# Altium PCB UsbConBoard.PcbDoc
Units mil, origin at the board's own origin, x right, y up, seen from the top; angles counter-clockwise.
Board outline 2755.91 x 787.4 mil, 2 copper layers (Top Layer, Bottom Layer), stack 61.756 mil thick; 29 components, 14 nets, 77 pads, 8 vias.
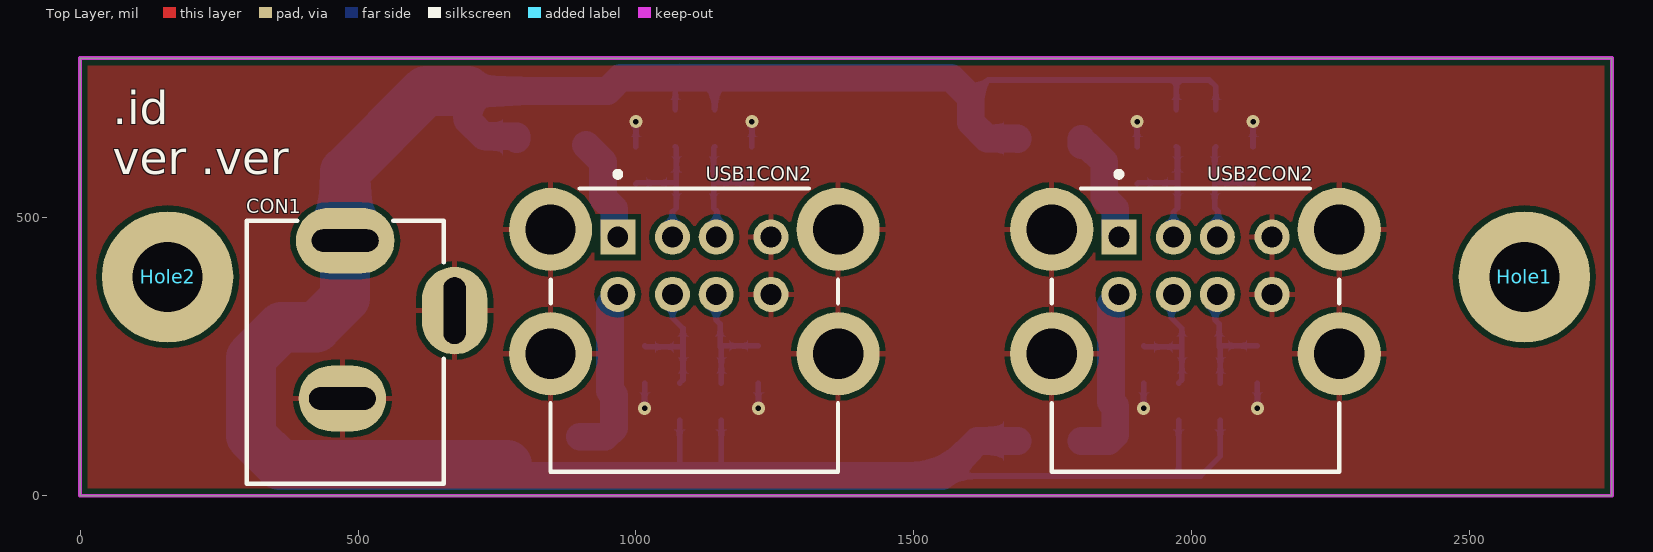
[diagram p0: Top Layer view]
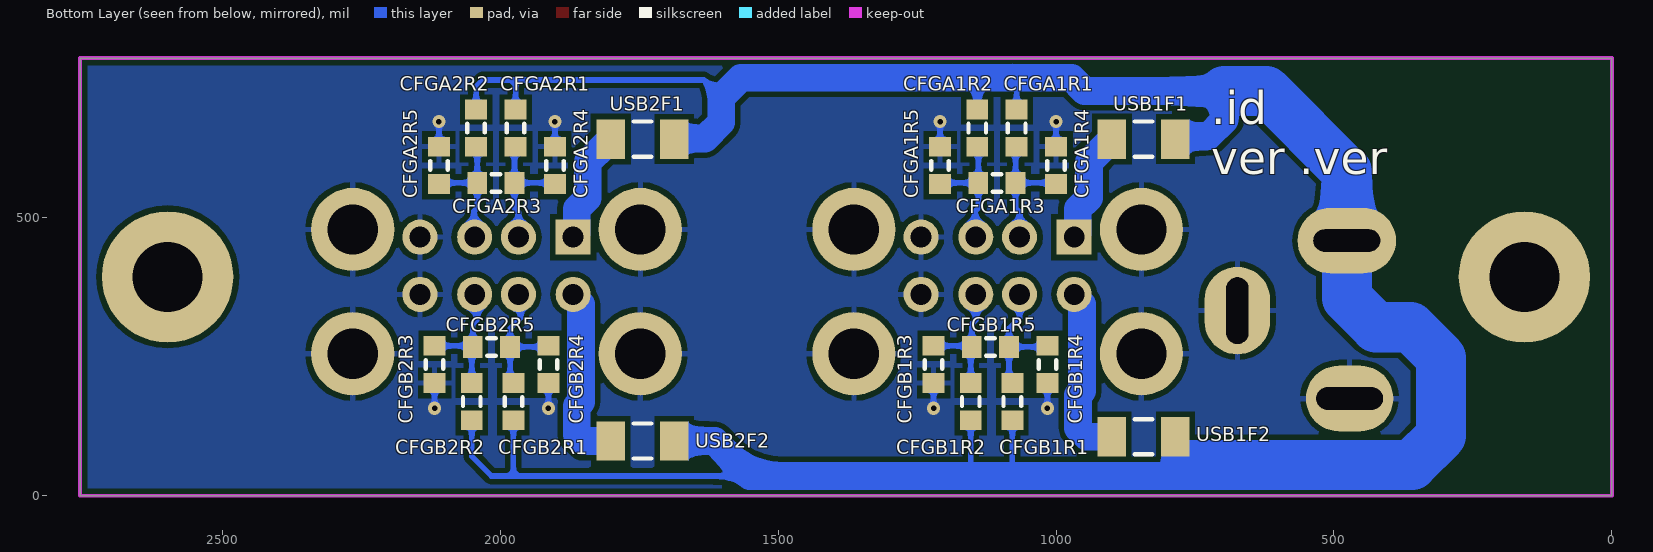
[diagram p1: Bottom Layer view, seen from below]

## Layer stack, top to bottom
Top Solder: solder mask 1, SM-001, Dk 4
Top Layer: signal copper 1.3779
Dielectric 1: core 59, Core-043, Dk 4.3
Bottom Layer: signal copper 1.3779
Bottom Solder: solder mask 1, SM-001, Dk 4

## Board outline
0,0 2755.91,0 2755.91,787.4 0,787.4

## Design rules (kind name [scope] priority, off if disabled: settings)
Clearance "Stitching GNDA" [IsStitchingVia and InNet('GNDA') vs (IsVia and (Not IsStitchingVia)) Or IsPad] p1: gap=5 ignorepadtopadclearanceinfootprint=FALSE except(0: Arc-Hole Track-Hole SMDPad-Hole THPad-Hole Via-Hole Fill-Hole Poly-Hole Region-Hole Text-Hole)
Clearance ShieldClearance_BOT [InNamedPolygon('GND_BOT') vs InNet('SHIELD')] p2: gap=30 ignorepadtopadclearanceinfootprint=FALSE except(0: Arc-Hole Track-Hole SMDPad-Hole THPad-Hole Via-Hole Fill-Hole Poly-Hole Region-Hole Text-Hole)
Clearance ANTClearance_TOP [InNamedPolygon('GND_TOP') vs InNetClass('50R')] p3: gap=13.78 ignorepadtopadclearanceinfootprint=FALSE
Clearance [All] p4: gap=7 ignorepadtopadclearanceinfootprint=TRUE except(10: Arc-Fill Arc-Poly Arc-Region Track-Fill Track-Poly Track-Region SMDPad-Fill SMDPad-Poly SMDPad-Region THPad-Fill THPad-Poly THPad-Region Via-Fill Via-Poly Via-Region Fill-Fill Fill-Poly Fill-Region Poly-Poly Poly-Region Region-Region)
DiffPairsRouting DIFF_USB [InDifferentialPair('USB')] p1: maxlimit=17.72 minlimit=7 mostfreqgap=7 toplayer_minwidth=10 toplayer_maxwidth=15.75 toplayer_prefwidth=12.99 bottomlayer_minwidth=10 bottomlayer_maxwidth=15.75 bottomlayer_prefwidth=12.99 maxuncoupledlength=500
Height [All] p1: minheight=0 maxheight=1200 prefheight=500
HoleSize [All] p1: absolutevalues=TRUE maxlimit=200 minlimit=1 maxpercent=80.000 minpercent=20.000
MatchedLengths DiffPair_100_2MatchedLengths [InNetClass('DIFF100_A')] p1: tolerance=1000 checknetsindiffpair=TRUE checkdiffpairvsdiffpair=FALSE checkxsignals=FALSE checkothers=FALSE
MatchedLengths DiffPair_100MatchedLengths [InNetClass('DIFF100_B')] p2: tolerance=5 checknetsindiffpair=TRUE checkdiffpairvsdiffpair=FALSE checkxsignals=FALSE checkothers=FALSE
MinimumSolderMaskSliver [All] p1: minsoldermaskwidth=1
PasteMaskExpansion [InNet('230V_N')] p1: expansion=20
PlaneClearance [All] p1: clearance=10
PlaneConnect Via_Thermal_Relief [IsStitchingVia Or IsVia] p1: planeconnectstyle=Direct reliefexpansion=20 reliefentries=4 reliefconductorwidth=10 reliefairgap=40
PlaneConnect ShieldConnect [InNet('SHIELD')] p2: planeconnectstyle=Relief reliefexpansion=20 reliefentries=4 reliefconductorwidth=10 reliefairgap=40
PlaneConnect [All] p3: planeconnectstyle=Relief reliefexpansion=8 reliefentries=4 reliefconductorwidth=8 reliefairgap=5
PolygonConnect GNDA_VIA_CONN [InNet('GND') And (IsStitchingVia Or IsVia)] p1: connectstyle=Direct reliefconductorwidth=10 reliefentries=4 polygonreliefangle="90 Angle" airgapwidth=10
PolygonConnect [All] p2: connectstyle=Relief reliefconductorwidth=10 reliefentries=4 polygonreliefangle="90 Angle" airgapwidth=10
RoomDefinition CFGB2 [InComponentClass('CFGB2')] p1: confinementstyle=ConfineIn formatcopy=TRUE lockcomponents=FALSE outline 1744.09,0 2263.78,0 2263.78,413.39 1744.09,413.39
RoomDefinition CFGB1 [InComponentClass('CFGB1')] p2: confinementstyle=ConfineIn formatcopy=TRUE lockcomponents=FALSE outline 846.46,0 1366.14,0 1366.14,413.39 846.46,413.39
RoomDefinition CFGA2 [InComponentClass('CFGA2')] p3: confinementstyle=ConfineIn formatcopy=TRUE lockcomponents=FALSE outline 1744.09,413.39 2263.78,413.39 2263.78,787.4 1744.09,787.4
RoomDefinition CFGA1 [InComponentClass('CFGA1')] p4: confinementstyle=ConfineIn formatcopy=TRUE lockcomponents=FALSE outline 842.52,413.39 1362.2,413.39 1362.2,787.4 842.52,787.4
RoutingVias [All] p1: holewidth=5.91 width=11.81 viastyle="Through Hole" minholewidth=5.91 minwidth=11.81 maxholewidth=500 maxwidth=1000
SilkToSilkClearance [All] p1: silktosilkclearance=5
SilkToSolderMaskClearance SilkscreenOverComponentPads [IsPad] p1: minsilkscreentomaskgap=1 clearancetoexposedcopper=TRUE
SolderMaskExpansion [InNet('230V_N')] p1: expansion=5
Width ANT [InNetClass('50R')] p1: maxlimit=23.43 minlimit=23.43 preferedwidth=23.43
Width GND [InNet('GND')] p2: maxlimit=100 minlimit=8 preferedwidth=50
Width 3V3 [InNet('3V3')] p3: maxlimit=40 minlimit=8 preferedwidth=30
Width 5V [InNet('5V')] p4: maxlimit=90 minlimit=10 preferedwidth=60
Width 24V [InNet('24V')] p5: maxlimit=80 minlimit=10 preferedwidth=60
Width [All] p6: maxlimit=100 minlimit=6 preferedwidth=8
21 further rules are at their usual default settings.

## Classes and differential pairs
channel class usb: USB1 USB2
component class USB2: USB2CON2 USB2F1 USB2F2
component class USB1: USB1CON2 USB1F1 USB1F2
component class CFGB2: CFGB2R1 CFGB2R2 CFGB2R3 CFGB2R4 CFGB2R5
component class CFGB1: CFGB1R1 CFGB1R2 CFGB1R3 CFGB1R4 CFGB1R5
component class CFGA2: CFGA2R1 CFGA2R2 CFGA2R3 CFGA2R4 CFGA2R5
component class CFGA1: CFGA1R1 CFGA1R2 CFGA1R3 CFGA1R4 CFGA1R5
channel class config: CFG1 CFG2

## Components (designator, comment, footprint, x,y, rotation, side; value= is the part's Value field where it differs from the comment)
CFGA1R1 "30k" RESC1608N 1070.87,661.42 r90 bottom (schematic designator R1)
CFGA1R2 "30k" RESC1608N 1141.73,661.42 r90 bottom (schematic designator R2)
CFGA1R3 "open" RESC1608N 1106.3,562.99 r0 bottom (schematic designator R3)
CFGA1R4 "20k" RESC1608N 1000,594.49 r270 bottom (schematic designator R4)
CFGA1R5 "20k" RESC1608N 1208.66,594.49 r270 bottom (schematic designator R5)
CFGA2R1 "30k" RESC1608N 1972.44,661.42 r90 bottom (schematic designator R1)
CFGA2R2 "30k" RESC1608N 2043.31,661.42 r90 bottom (schematic designator R2)
CFGA2R3 "open" RESC1608N 2007.87,562.99 r0 bottom (schematic designator R3)
CFGA2R4 "20k" RESC1608N 1901.57,594.49 r270 bottom (schematic designator R4)
CFGA2R5 "20k" RESC1608N 2110.24,594.49 r270 bottom (schematic designator R5)
CFGB1R1 "30k" RESC1608N 1078.74,169.29 r270 bottom (schematic designator R1)
CFGB1R2 "30k" RESC1608N 1153.54,169.29 r270 bottom (schematic designator R2)
CFGB1R3 "open" RESC1608N 1118.11,267.72 r0 bottom (schematic designator R3)
CFGB1R4 "20k" RESC1608N 1015.75,236.22 r90 bottom (schematic designator R4)
CFGB1R5 "20k" RESC1608N 1220.47,236.22 r90 bottom (schematic designator R5)
CFGB2R1 "30k" RESC1608N 1976.38,169.29 r270 bottom (schematic designator R1)
CFGB2R2 "30k" RESC1608N 2051.18,169.29 r270 bottom (schematic designator R2)
CFGB2R3 "open" RESC1608N 2015.75,267.72 r0 bottom (schematic designator R3)
CFGB2R4 "20k" RESC1608N 1913.39,236.22 r90 bottom (schematic designator R4)
CFGB2R5 "20k" RESC1608N 2118.11,236.22 r90 bottom (schematic designator R5)
CON1 "1613 21" JACK-2.5 572.89,317.05 r90 top
Hole1 "Hole" HOLE-6/3.2 2598.43,393.7 r0 top locked
Hole2 "Hole" HOLE-6/3.2 157.48,393.7 r0 top locked
USB1CON2 "FCK002A" USB-A-SOCKET-DOUBLE 1105.12,367.32 r270 top locked (schematic designator CON2)
USB1F1 "0ZCJ0200FF2C" FUSE_1206 842.52,641.73 r180 bottom (schematic designator F1)
USB1F2 "0ZCJ0200FF2C" FUSE_1206 842.52,106.3 r180 bottom (schematic designator F2)
USB2CON2 "FCK002A" USB-A-SOCKET-DOUBLE 2006.69,367.32 r270 top locked (schematic designator CON2)
USB2F1 "0ZCJ0200FF2C" FUSE_1206 1744.09,641.73 r180 bottom (schematic designator F1)
USB2F2 "0ZCJ0200FF2C" FUSE_1206 1744.09,98.43 r180 bottom (schematic designator F2)

## Footprints (in the part's own frame and the unit in brackets; to place one, negate y for a bottom-side part, rotate by r counter-clockwise, add the part's x,y. Pads: shape width x height; smd on the part's side, far side on the other; paste and mask are expansions set on the pad)
FUSE_1206 [mm] "PTC SMD"
  rect 1.3x1.8 smd: 1(-1.45,0) 2(1.45,0)
  silkscreen extent -0.4,-0.8 0.4,0.8, body extent -1.6,-0.83 1.6,0.83, height 1.45
HOLE-6/3.2 [mm]
  round 6 hole 3.2: 1(0,0)
JACK-2.5 [mm] "DC Power Jack, 2.5mm, KLD Series, PCB Mount"
  oval 3x4.5 hole 1.016 slot 3.048 at 90 deg: 1(3.608,2.437)
  oval 3x4 hole 1.016 slot 3.048 at 90 deg: 2(-3.608,2.564)
  oval 4x3 hole 1.016 slot 3.048 at 0 deg: 3(0.408,-2.564)
  silkscreen extent -7.5,-2.06 4.51,6.94, body extent -10.08,-2.82 4.12,6.88, height 10.85
RESC1608N [mm] "Chip Resistor, Body 1.6x0.8mm, IPC Medium Density"
  rect 0.9x1 smd: 1(-0.85,0) 2(0.85,0)
  silkscreen extent -0.2,-0.4 0.2,0.4, body extent -0.8,-0.4 0.8,0.4, height 0.3
USB-A-SOCKET-DOUBLE [mm]
  rect 1.6x1.6 hole 0.95: 1(-2.49,-3.5)
  round 1.6 hole 0.95: 2(-2.49,-1) 3(-2.49,1) 4(-2.49,3.5) 5(0.13,-3.5) 6(0.13,-1) 7(0.13,1) 8(0.13,3.5)
  round 3.8 hole 2.3: 9(2.84,6.57) 10(2.84,-6.57) 11(-2.84,6.57) 12(-2.84,-6.57)
  silkscreen extent -5.48,-6.57 8.24,6.57, body extent -4.13,-7.73 55.81,7.73, height 16.5

## Part data
CFGA1R1 CFGA1R2 CFGA1R4 CFGA1R5 CFGA2R1 CFGA2R2 CFGA2R4 CFGA2R5 CFGB1R1 CFGB1R2 CFGB1R4 CFGB1R5 CFGB2R1 CFGB2R2 CFGB2R4 CFGB2R5: library part Resistor, "Resistor", Power=0W1, Tolerance=1%
CFGA1R3 CFGA2R3 CFGB1R3 CFGB2R3: library part Resistor, "Resistor", Power=0W, Tolerance=5%
CON1: library part JACK-2.5, "Low Voltage Power Supply Connector", manid="1613 21"
Hole1 Hole2: library part HOLE_
USB1CON2 USB2CON2: library part USB-A-Sock-Double, "Dual USB A connector", manid=FCK002A
USB1F1 USB1F2 USB2F1 USB2F2: library part PTC, "PTC SMD Fuses", I_nom=2A, I_trip=3A5, manid=0ZCJ0200FF2C

## Via types
v1: diameter 23.62, hole 9.84, Top Layer to Bottom Layer, tented both sides, 8 vias

## Nets (pads, with @x,y where several pads share a name; then routed paths per layer and width w, separated by ;. In a path a pad name is that pad's centre, name@x,y a point inside that pad or via, vN(x,y) a via of type N, cw(c..) or ccw(c..) an arc to the next point about the centre after c; other vN are vias at no path point)
5V: CFGA1R1.2 CFGA1R2.2 CFGA2R1.2 CFGA2R2.2 CFGB1R1.2 CFGB1R2.2 CFGB2R1.2 CFGB2R2.2 CON1.1 USB1F1.2 USB1F2.2 USB2F1.2 USB2F2.2 | length 5054.7
  Bottom Layer w10: CFGA1R1.2 1070.87,744.03 1078.74,751.9 ; 1078.74,43.31 CFGB1R1.2 ; CFGA1R2.2 1141.73,751.9 ; 1153.54,43.31 CFGB1R2.2 ; 1551.25,35.5 1976.38,35.5 ; 1602.36,716.54 1633.86,748.03 1972.44,748.03 ; CFGA2R1.2 1972.44,748.03 ; CFGB2R1.2 1976.38,35.5 ; CFGA2R2.2 2043.31,736.22 2031.5,748.03 1972.44,748.03 ; CFGB2R2.2 2051.18,70.87 2015.81,35.5 1976.38,35.5
  Bottom Layer w50: 767.72,35.5 1551.25,35.5 1614.17,98.43 USB2F2.2 ; USB1F1.2 785.43,646.14 784.84,646.73 726.14,646.73 696.85,676.02 696.85,728.35 948.82,728.35 972.37,751.9 1078.74,751.9 1141.73,751.9 1567,751.9 1602.36,716.54 1602.36,672.09 1631.65,642.8 1686.42,642.8 1687.01,642.21 USB2F1.2
  Bottom Layer w90: 696.85,728.35 622.05,728.35 476.97,583.27 CON1.1 476.97,355.87 424.25,303.15 362.2,303.15 307.09,248.03 307.09,108.22 359.81,55.5 767.72,55.5
GND: CFGA1R4.1 CFGA1R5.1 CFGA2R4.1 CFGA2R5.1 CFGB1R4.1 CFGB1R5.1 CFGB2R4.1 CFGB2R5.1 CON1.2 CON1.3 USB1CON2.4 USB1CON2.8 USB1CON2.9 USB1CON2.10 USB1CON2.11 USB1CON2.12 USB2CON2.4 USB2CON2.8 USB2CON2.9 USB2CON2.10 USB2CON2.11 USB2CON2.12 | length 362.2
  Bottom Layer w10: CFGA1R4.1 v1(1000,673.23) ; v1(1015.75,157.48) CFGB1R4.1 ; CFGA1R5.1 v1(1208.66,673.23) ; v1(1220.47,157.48) CFGB1R5.1 ; CFGA2R4.1 v1(1901.57,673.23) ; v1(1913.39,157.48) CFGB2R4.1 ; CFGA2R5.1 v1(2110.24,673.23) ; v1(2118.11,157.48) CFGB2R5.1
NetUSB1CON2_1: USB1CON2.1 USB1F1.1 | length 180.5
  Bottom Layer w50: USB1F1.1@910.04,631.3 940.94,600.39 940.94,535.69 960.83,515.81 USB1CON2.1@960.83,471.85
NetUSB1CON2_5: USB1CON2.5 USB1F2.1 | length 316.6
  Bottom Layer w50: USB1F2.1 944.88,106.3 960.63,122.05 960.63,181.1 953.26,188.47 953.26,344.63 967.32,358.69 USB1CON2.5
NetUSB2CON2_1: USB2CON2.1 USB2F1.1 | length 210.2
  Bottom Layer w50: USB2F1.1 1801.18,631.89 1801.77,631.3 1811.61,631.3 1842.52,600.39 1842.52,535.69 1862.4,515.81 1862.4,471.85 USB2CON2.1
NetUSB2CON2_5: USB2CON2.5 USB2F2.1 | length 326.8
  Bottom Layer w50: USB2F2.1 1850.39,98.43 1862.2,110.24 1862.2,161.42 1854.83,168.79 1854.83,344.63 1868.9,358.69 USB2CON2.5
USB1DNA: CFGA1R1.1 CFGA1R3.1 CFGA1R4.2 USB1CON2.2 | length 240
  Bottom Layer w10: CFGA1R4.2 1001.97,562.99 CFGA1R3.1 ; USB1CON2.2 1065.75,510.63 1072.83,517.72 CFGA1R3.1 ; CFGA1R1.1 1072.83,625.98 CFGA1R3.1
USB1DNB: CFGB1R1.1 CFGB1R3.1 CFGB1R4.2 USB1CON2.6 | length 239.4
  Bottom Layer w10: CFGB1R4.2 1017.72,267.72 CFGB1R3.1 ; USB1CON2.6 1065.75,320.08 1084.65,301.18 CFGB1R3.1 ; CFGB1R1.1 1084.65,208.66 CFGB1R3.1
USB1DPA: CFGA1R2.1 CFGA1R3.2 CFGA1R5.2 USB1CON2.3 | length 236.1
  Bottom Layer w10: CFGA1R2.1 1139.76,625.98 CFGA1R3.2 ; USB1CON2.3 1145.67,466.53 1145.67,511.81 1139.76,517.72 CFGA1R3.2 ; CFGA1R5.2 1206.69,562.99 CFGA1R3.2
USB1DPB: CFGB1R2.1 CFGB1R3.2 CFGB1R5.2 USB1CON2.7 | length 232.9
  Bottom Layer w10: USB1CON2.7 1144.49,316.14 1151.57,309.06 CFGB1R3.2 ; CFGB1R2.1 1153.54,265.75 CFGB1R3.2 ; CFGB1R5.2 1153.54,269.69 CFGB1R3.2
USB2DNA: CFGA2R1.1 CFGA2R3.1 CFGA2R4.2 USB2CON2.2 | length 240
  Bottom Layer w10: CFGA2R4.2 1903.54,562.99 CFGA2R3.1 ; USB2CON2.2 1967.32,510.63 1974.41,517.72 CFGA2R3.1 ; CFGA2R1.1 1974.41,625.98 CFGA2R3.1
USB2DNB: CFGB2R1.1 CFGB2R3.1 CFGB2R4.2 USB2CON2.6 | length 239.4
  Bottom Layer w10: CFGB2R4.2 1915.35,267.72 CFGB2R3.1 ; USB2CON2.6@1963.39,362.2 1963.39,320.08 1982.28,301.18 CFGB2R3.1 ; CFGB2R1.1 1982.28,208.66 CFGB2R3.1
USB2DPA: CFGA2R2.1 CFGA2R3.2 CFGA2R5.2 USB2CON2.3 | length 236.1
  Bottom Layer w10: CFGA2R2.1 2041.34,625.98 CFGA2R3.2 ; USB2CON2.3 2047.24,466.53 2047.24,511.81 2041.34,517.72 CFGA2R3.2 ; CFGA2R5.2 2108.27,562.99 CFGA2R3.2
USB2DPB: CFGB2R2.1 CFGB2R3.2 CFGB2R5.2 USB2CON2.7 | length 232.9
  Bottom Layer w10: USB2CON2.7@2042.13,362.2 2042.13,316.14 2049.21,309.06 CFGB2R3.2 ; CFGB2R2.1 2051.18,265.75 CFGB2R3.2 ; CFGB2R5.2 2051.18,269.69 CFGB2R3.2
pads on no net: Hole1.1 Hole2.1

## Polygon pours and split planes (outlines as drawn)
GND on Top Layer "GND_TOP" (solid, remove dead copper, pour order 0): 0,787.4 2755.91,787.4 2755.91,0 0,0
GND on Bottom Layer "GND_TOP" (solid, remove dead copper, pour order 2): 0,787.4 0,0 2755.91,0 2755.91,787.4

## Keep-outs
Keep-Out Layer:
  the board outline again, w7

## Silkscreen, mask and mechanical layers (free items; w line width, h text height)
Top Overlay:
  text ".id / ver .ver" at 59.06,578.74 h60
Bottom Overlay:
  text ".id / ver .ver" at 720.47,578.74 h60

## Dimensions
0,787.4 to 2755.91,787.4 on Mechanical 15
0,787.4 to 0,0 on Mechanical 15